# EAGLE board CT_schematic (EAGLE 7.6.0)

Size 100 x 80 mm. Coordinates in mm from the lower left corner, seen from the top.
Outline: 0,0 100,0 100,80 0,80 0,0
Copper layers (1*16): Top 0.035mm / dielectric 1.5mm / Bottom 0.035mm
Design rules "default": minimum track width 10mil, minimum drill 24mil, track to track 8mil, track to pad 8mil, pad to pad 8mil, via to via 8mil, smd to smd 8mil, copper to edge 40mil, drill to drill 8mil, minimum pad ring 10mil, minimum via ring 8mil, stop-mask expansion 4mil, vias tented up to drill 0mil, thermal gap 10mil

## Footprints (pad centres in the part's own frame; a part is rotated, then mirrored left to right if it is on the bottom)
C0603 = smd 0.8 x 0.8: 1 -0.762,0; 2 0.762,0
C0402 = smd 0.5 x 0.5: 1 -0.508,0; 2 0.508,0
C1210 = smd 1.2 x 2.5: 1 -1.524,0; 2 1.524,0
C1206 = smd 1.3 x 1.6: 1 -1.524,0; 2 1.524,0
L0603 = smd 0.8 x 0.8: 1 -0.762,0; 2 0.762,0
L1210 = smd 1.2 x 2.5: 1 -1.524,0; 2 1.524,0
R0603 = smd 0.8 x 0.8: 1 -0.762,0; 2 0.762,0
WLCSP36 = smd 0.229 x 0.229: A1 -1,1; A2 -0.6,1; A3 -0.2,1; A4 0.2,1; A5 0.6,1; A6 1,1; B1 -1,0.6; B2 -0.6,0.6; B3 -0.2,0.6; B4 0.2,0.6; B5 0.6,0.6; B6 1,0.6; C1 -1,0.2; C2 -0.6,0.2; C3 -0.2,0.2; C4 0.2,0.2; C5 0.6,0.2; C6 1,0.2; D1 -1,-0.2; D2 -0.6,-0.2; D3 -0.2,-0.2; D4 0.2,-0.2; D5 0.6,-0.2; D6 1,-0.2; E1 -1,-0.6; E2 -0.6,-0.6; E3 -0.2,-0.6; E4 0.2,-0.6; E5 0.6,-0.6; E6 1,-0.6; F1 -1,-1; F2 -0.6,-1; F3 -0.2,-1; F4 0.2,-1; F5 0.6,-1; F6 1,-1
SSOP-16 = smd 1.981 x 0.356: 1 -2.464,2.223; 2 -2.464,1.587; 3 -2.464,0.953; 4 -2.464,0.318; 5 -2.464,-0.318; 6 -2.464,-0.953; 7 -2.464,-1.587; 8 -2.464,-2.223; 9 2.464,-2.223; 10 2.464,-1.587; 11 2.464,-0.953; 12 2.464,-0.318; 13 2.464,0.318; 14 2.464,0.953; 15 2.464,1.587; 16 2.464,2.223
HTSS-105-01-G-D = drill 1 pad 1.8 square: 1 0,0 | drill 1 pad 1.8: 2 0,2.54; 3 2.54,0; 4 2.54,2.54; 5 5.08,0; 6 5.08,2.54; 7 7.62,0; 8 7.62,2.54; 9 10.16,0; 10 10.16,2.54
FCI_10118193-0001LF = smd 0.4 x 1.35: 1 -1.3,2.675; 2 -0.65,2.675; 3 0,2.675; 4 0.65,2.675; 5 1.3,2.675 | smd 1.6 x 1.4: 6 -3.2,2.45; 7 3.2,2.45 | smd 1.9 x 1.9: 8 -1.2,0; 9 1.2,0 | hole 0.5: -3.3,0; 3.3,0
SOT143B = smd 1 x 0.7: 1 -0.75,-1 | smd 0.6 x 0.7: 2 0.95,-1; 3 0.95,1; 4 -0.95,1
ASEK = smd 1.4 x 1: 1 -1.1,-0.8; 2 1.1,-0.8; 3 1.1,0.8; 4 -1.1,0.8
SOIC-8_EP = smd 1.6 x 0.533: 1 -2.921,1.905; 2 -2.921,0.635; 3 -2.921,-0.635; 4 -2.921,-1.905; 5 2.921,-1.905; 6 2.921,-0.635; 7 2.921,0.635; 8 2.921,1.905 | smd 2.54 x 3.302: EPAD 0,0 | drill 0.406 pad 0.406: P$1 -0.508,0.635; P$2 0.381,0.635; P$3 -0.508,-0.635; P$4 0.381,-0.635
DFN8_2X3MC = smd 0.813 x 0.305: 1 -1.398,0.75; 2 -1.398,0.25; 3 -1.398,-0.25; 4 -1.398,-0.75; 5 1.398,-0.75; 6 1.398,-0.25; 7 1.398,0.25; 8 1.398,0.75 | smd 1.753 x 1.549: 9 0,0
JST-2-SMD = smd 1 x 4.6: 1 -1,-3.7; 2 1,-3.7 | smd 1.6 x 3.4: NC1 -3.4,1.5; NC2 3.4,1.5
SON-6 = smd 0.55 x 0.3: 1 -0.355,0.5 | smd 0.52 x 0.3: 2 -0.37,0; 3 -0.37,-0.5; 4 0.37,-0.5; 5 0.37,0; 6 0.37,0.5
SW_4-1437565-2 = smd 1.4 x 2.1: 1 -2.23,4.55; 2 -2.23,-4.55; 3 2.23,4.55; 4 2.23,-4.55
LGM67K-G1J2-24-Z = smd 0.8 x 1.4: A -2,0; C 0,0
NC7SZ125M5X = smd 1.3 x 0.7: 1 -1.3,0.95; 2 -1.3,0; 3 -1.3,-0.95; 4 1.3,-0.95; 5 1.3,0.95
DUMMY_PACKAGE_108 = drill 0.3: 1 0,-1; 2 1.5,-1; 3 3,-1

## Placement (x,y rotation side)
C1  1e-07  [C0603]  -52.07,48.26 0 top  (outside the outline)
C2  1e-07  [C0603]  -55.88,48.26 0 top  (outside the outline)
C3  1e-07  [C0603]  -15.24,53.34 0 top  (outside the outline)
C4  1e-07  [C0603]  -19.05,53.34 0 top  (outside the outline)
C5  4.7e-06  [C0603]  -44.45,48.26 0 top  (outside the outline)
C6  1e-08  [C0603]  -22.86,53.34 0 top  (outside the outline)
C7  1e-06  [C0603]  -26.67,53.34 0 top  (outside the outline)
C8  1e-06  [C0603]  -30.48,53.34 0 top  (outside the outline)
C9  1e-06  [C0603]  -34.29,53.34 0 top  (outside the outline)
C10  2.2e-07  [C0603]  -48.26,48.26 0 top  (outside the outline)
C11  1e-06  [C0603]  -38.1,53.34 0 top  (outside the outline)
C12  1e-06  [C0603]  -41.91,53.34 0 top  (outside the outline)
C13  1e-08  [C0402]  -26.67,58.42 0 top  (outside the outline)
C14  1e-05  [C1210]  -29.21,35.56 0 top  (outside the outline)
C15  1e-05  [C1210]  -35.56,35.56 0 top  (outside the outline)
C16  1e-05  [C1210]  -41.91,35.56 0 top  (outside the outline)
C17  1e-05  [C1210]  -48.26,35.56 0 top  (outside the outline)
C18  1e-07  [C0402]  -30.48,58.42 0 top  (outside the outline)
C19  1e-05  [C1206]  -22.86,41.91 0 top  (outside the outline)
C20  1e-05  [C1206]  -29.21,41.91 0 top  (outside the outline)
C21  1e-08  [C0402]  -34.29,58.42 0 top  (outside the outline)
F1  240.0  [L0603]  -45.72,53.34 0 top  (outside the outline)
I1  1e-05  [L1210]  -54.61,35.56 0 top  (outside the outline)
R1  10000.0  [R0603]  -20.32,48.26 0 top  (outside the outline)
R2  1000.0  [R0603]  -49.53,53.34 0 top  (outside the outline)
R3  1600.5  [R0603]  -53.34,53.34 0 top  (outside the outline)
R4  4700.0  [R0603]  -57.15,53.34 0 top  (outside the outline)
R5  10000.0  [R0603]  -25.4,48.26 0 top  (outside the outline)
R6  100000.0  [R0603]  -49.53,41.91 0 top  (outside the outline)
R7  4031.5447154472  [R0603]  -44.45,41.91 0 top  (outside the outline)
R8  2200.0  [R0603]  -15.24,58.42 0 top  (outside the outline)
R9  10000.0  [R0603]  -30.48,48.26 0 top  (outside the outline)
R10  10000.0  [R0603]  -35.56,48.26 0 top  (outside the outline)
R11  9100.0  [R0603]  -19.05,58.42 0 top  (outside the outline)
R12  680000.0  [R0603]  -54.61,41.91 0 top  (outside the outline)
R13  120000.0  [R0603]  -15.24,48.26 0 top  (outside the outline)
R14  2000.0  [R0603]  -22.86,58.42 0 top  (outside the outline)
R15  10000.0  [R0603]  -40.64,48.26 0 top  (outside the outline)
U1  STM32L052T8Y6  [WLCSP36]  -15.24,41.91 0 top  (outside the outline)
U2  LTC2804CGN-1#PBF  [SSOP-16]  -29.21,17.78 0 top  (outside the outline)
U3  HTSS-105-01-G-D  [HTSS-105-01-G-D]  -48.26,16.51 0 top  (outside the outline)
U4  10118193-0001LF  [FCI_10118193-0001LF]  -19.05,26.67 0 top  (outside the outline)
U5  prtr5v0u2ax  [SOT143B]  -46.99,58.42 0 top  (outside the outline)
U6  ASEK-32.768KHz-ECST  [ASEK]  -40.64,27.94 0 top  (outside the outline)
U7  MIC5234YME  [SOIC-8_EP]  -48.26,26.67 0 top  (outside the outline)
U8  MCP73831T-2ACI/MC  [DFN8_2X3MC]  -15.24,62.23 0 top  (outside the outline)
U9  S2B-PH-SM4-TB(LF)(SN)  [JST-2-SMD]  -41.91,6.35 0 top  (outside the outline)
U10  TPS3895ADRYR  [SON-6]  -55.88,57.15 0 top  (outside the outline)
U11  4-1437565-2  [SW_4-1437565-2]  -27.94,6.35 0 top  (outside the outline)
U12  Q65110A2395  [LGM67K-G1J2-24-Z]  -17.78,35.56 0 top  (outside the outline)
U13  nc7sz125m5x  [NC7SZ125M5X]  -34.29,40.64 0 top  (outside the outline)
U14  Dummy  [DUMMY_PACKAGE_108]  -53.34,58.42 0 top  (outside the outline)

## Library data of the parts
C1-C21 F1 I1 R1-R15 U1-U14 = circuit_tree

## Nets
CLK_U1_A6: U1.A6 U6.3
GND: C1.2 C2.2 C3.2 C4.2 C5.2 C6.2 C7.2 C8.2 C9.2 C11.2 C12.2 C13.2 C14.2 C15.2 C16.2 C17.2 C18.2 C19.2 C20.2 C21.2 R2.2 R5.2 R8.2 R11.2 R13.2 R14.2 U1.D6 U2.8 U3.9 U4.5 U4.6 U4.7 U4.8 U4.9 U5.1 U6.2 U7.7 U7.EPAD U8.6 U8.9 U9.2 U10.2 U12.C U13.1 U13.3 U14.1
INPUT_USBPOWER_5V: C19.1 R15.2 U4.1 U5.4 U8.1 U8.2
NET_U1_C5: R5.1 U1.C5
NET_U1_C6: R4.1 U1.C6 U13.4
NET_U1_D5: C6.1 C7.1 F1.1 U1.D5 U1.E6
NET_U1_F5: R3.1 U1.F5 U12.A
NET_U1_F6: R1.1 U1.F6 U11.3 U11.4
NET_U2_6: C8.1 U2.6
NET_U2_7: C10.1 I1.2 U2.7
NET_U2_9: C9.1 U2.9
NET_U2_10: C10.2 U2.10
NET_U2_11: R6.1 U2.11
NET_U3_3: U2.1 U3.3
NET_U3_4: U2.2 U3.4
NET_U3_5: U2.3 U3.5
NET_U3_6: U2.4 U3.6
NET_U7_4: R7.2 R8.1 U7.4
NET_U8_5: R15.1 U8.5
NET_U8_8: R14.1 U8.8
NET_U10_1: R10.1 R11.1 U10.1
NET_U10_3: R12.2 R13.1 U10.3
NET_U10_4: R9.1 U10.4 U13.2
NET_U11_1: R2.1 U11.1 U11.2
PROC_LPUART1_CTS: U1.E3 U2.13
PROC_LPUART1_RTS: U1.C3 U2.15
PROC_LPUART1_RX: U1.D2 U2.16
PROC_LPUART1_TX: U1.E2 U2.14
PROC_TIM2_CH1: U1.A2 U14.2
PROC_TIM2_CH2: U1.B3 U14.3
PROC_USB_DM: U1.C2 U4.2 U5.3
PROC_USB_DP: U1.B1 U4.3 U5.2
VCC_S1_3V7: C14.1 C15.1 C20.1 U7.5 U7.8 U8.3 U8.4 U9.1
VCC_TIER1_3V3: C1.1 C2.1 C3.1 C4.1 C5.1 C11.1 C12.1 C13.1 C16.1 C17.1 C18.1 C21.1 F1.2 I1.1 R1.2 R3.2 R4.2 R6.2 R7.1 R9.2 R10.2 R12.1 U1.A5 U1.F1 U2.5 U2.12 U6.4 U7.1 U10.6 U13.5

## Tracks (layer width: path | path; a pad name or v marks a point on that pad's centre or on a via)
CLK_U1_A6  (1 unrouted)
GND  (45 unrouted)
INPUT_USBPOWER_5V  (5 unrouted)
NET_U1_C5  (1 unrouted)
NET_U1_C6  (2 unrouted)
NET_U1_D5  (4 unrouted)
NET_U1_F5  (2 unrouted)
NET_U1_F6  (3 unrouted)
NET_U2_6  (1 unrouted)
NET_U2_7  (2 unrouted)
NET_U2_9  (1 unrouted)
NET_U2_10  (1 unrouted)
NET_U2_11  (1 unrouted)
NET_U3_3  (1 unrouted)
NET_U3_4  (1 unrouted)
NET_U3_5  (1 unrouted)
NET_U3_6  (1 unrouted)
NET_U7_4  (2 unrouted)
NET_U8_5  (1 unrouted)
NET_U8_8  (1 unrouted)
NET_U10_1  (2 unrouted)
NET_U10_3  (2 unrouted)
NET_U10_4  (2 unrouted)
NET_U11_1  (2 unrouted)
PROC_LPUART1_CTS  (1 unrouted)
PROC_LPUART1_RTS  (1 unrouted)
PROC_LPUART1_RX  (1 unrouted)
PROC_LPUART1_TX  (1 unrouted)
PROC_TIM2_CH1  (1 unrouted)
PROC_TIM2_CH2  (1 unrouted)
PROC_USB_DM  (2 unrouted)
PROC_USB_DP  (2 unrouted)
VCC_S1_3V7  (7 unrouted)
VCC_TIER1_3V3  (29 unrouted)